# Altium PCB nfc_3911_pcb20190303_1700.PcbDoc
Units mm, origin at the board's own origin, x right, y up, seen from the top; angles counter-clockwise.
Board outline 152.4 x 101.6 mm, 2 copper layers (Top Layer, Bottom Layer); 78 components, 54 nets, 227 pads, 9 vias.
Unrouted connection lines stored in the file: 59.
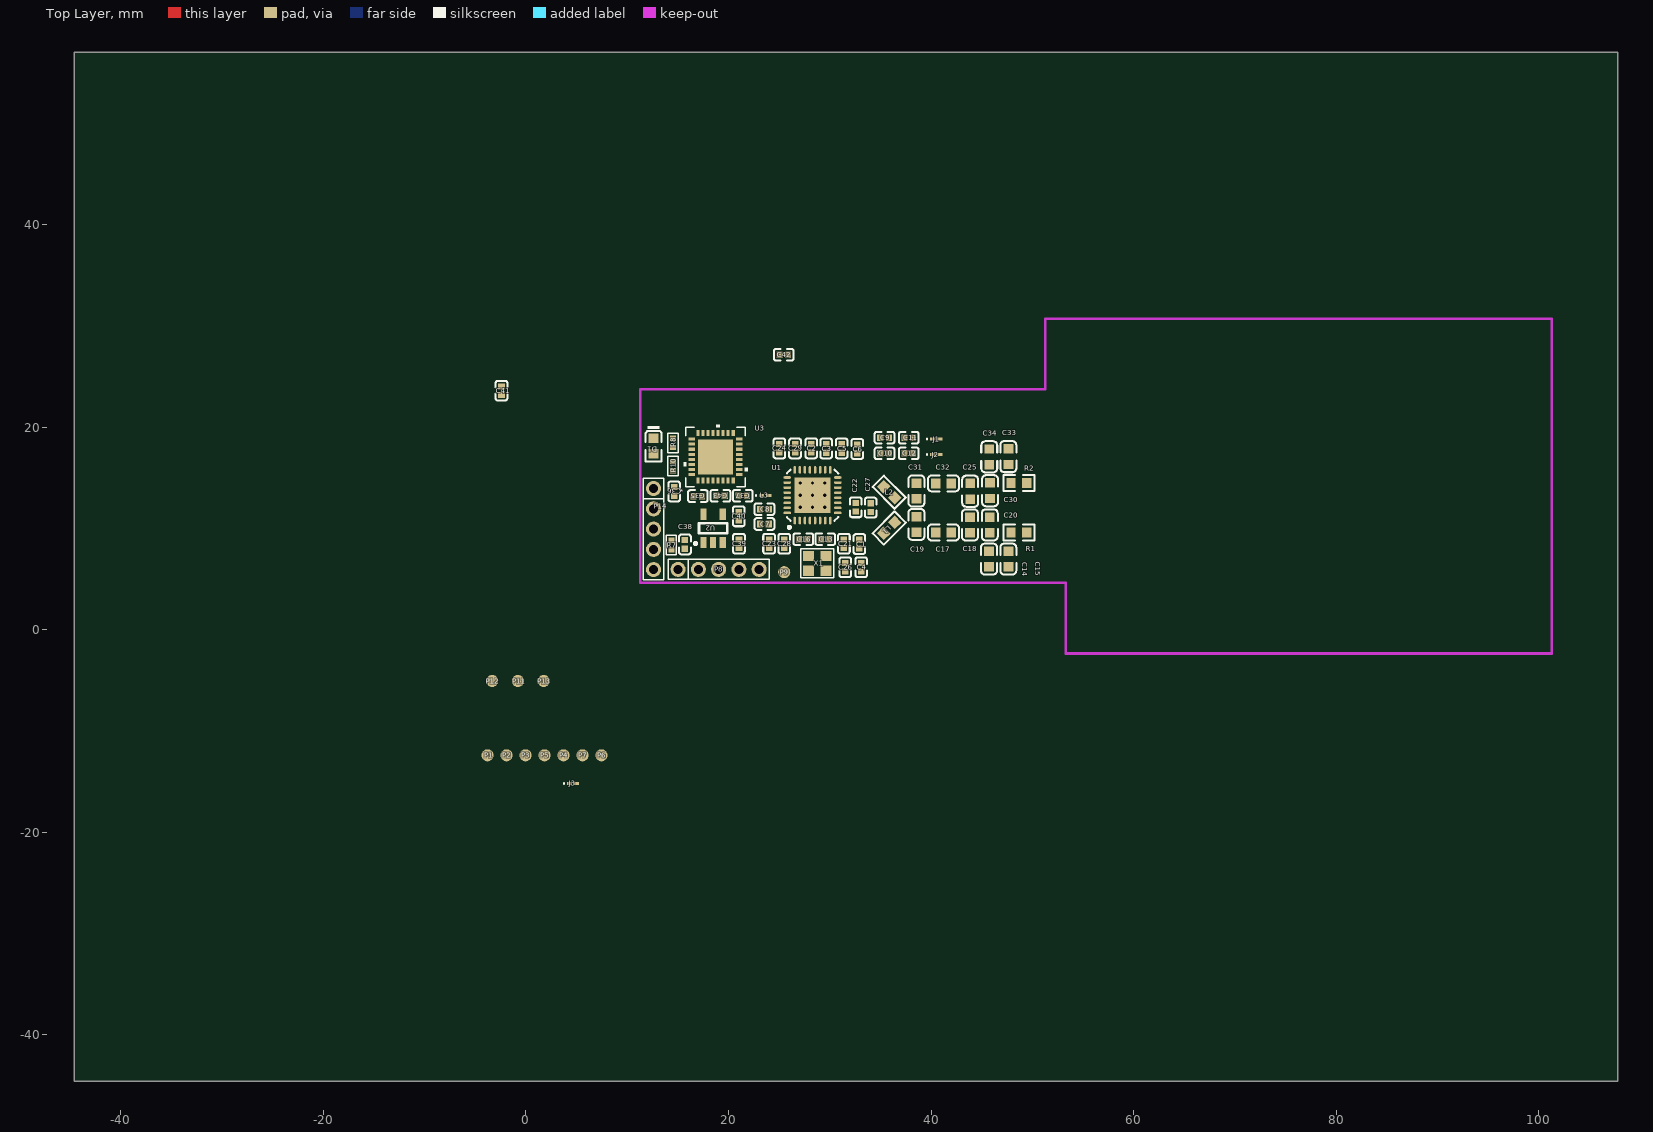
[diagram p0: Top Layer view]
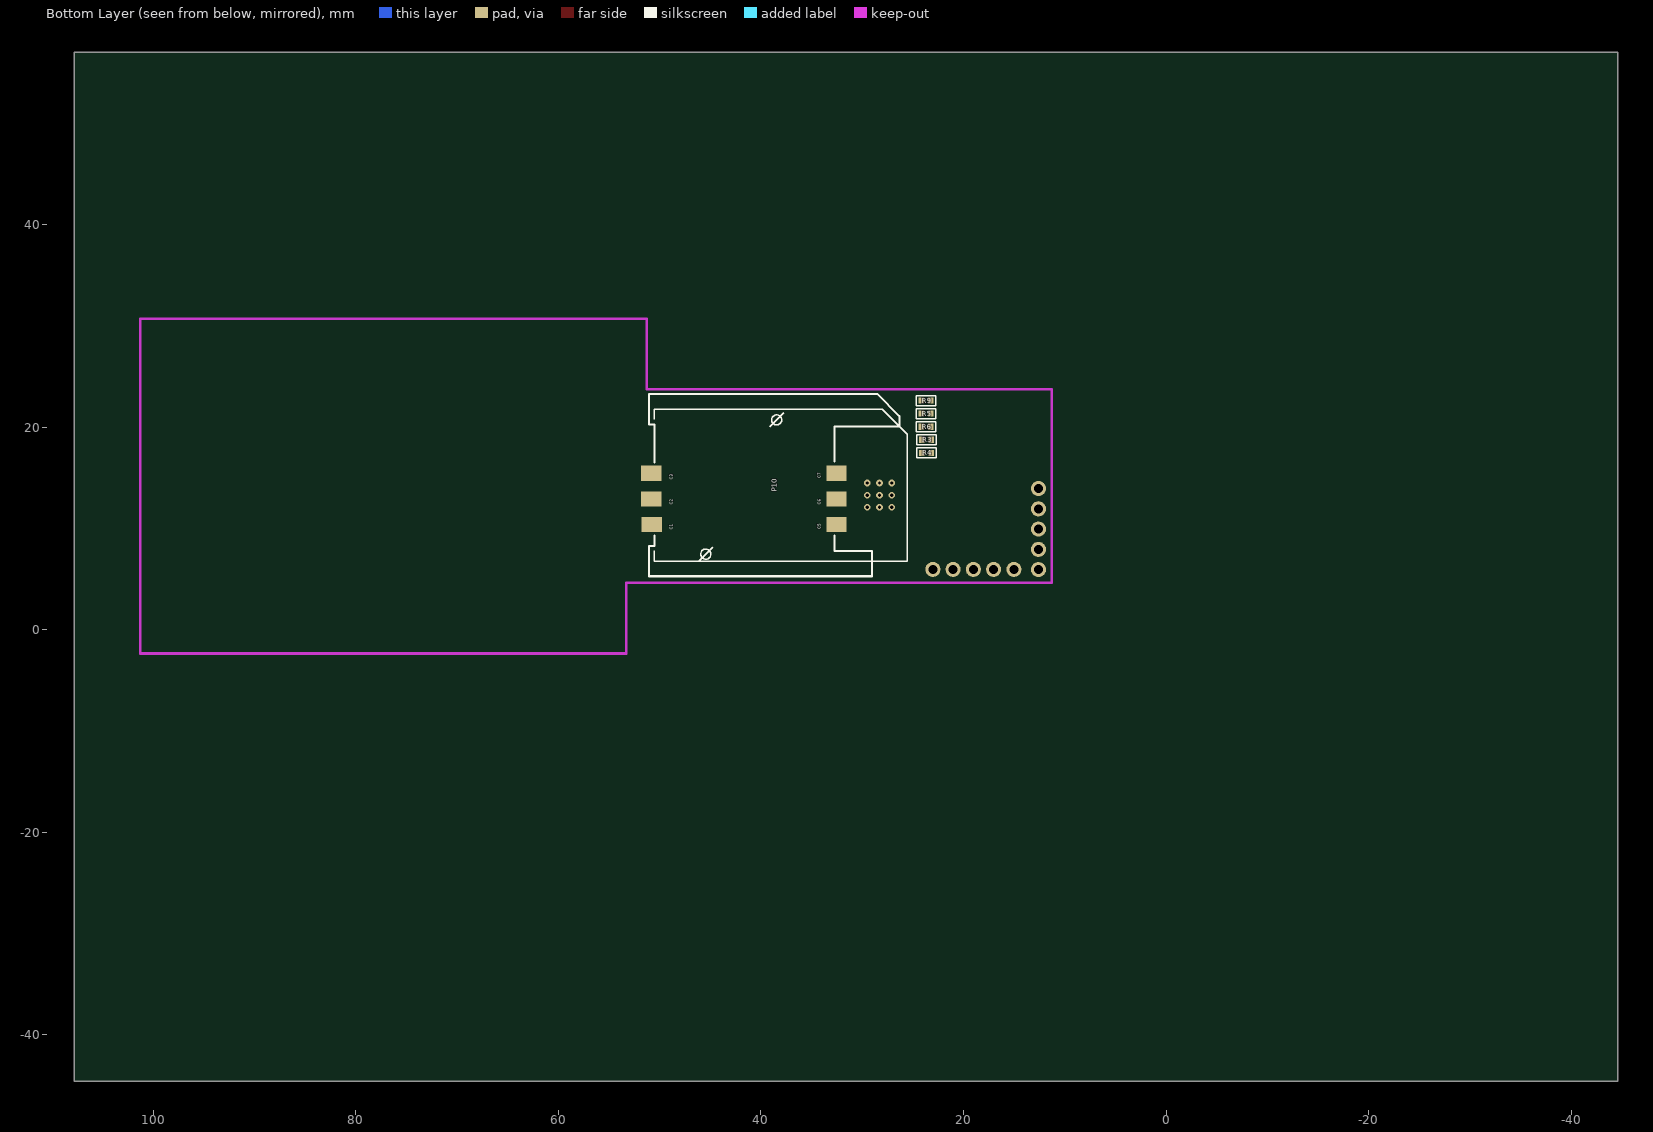
[diagram p1: Bottom Layer view, seen from below]

## Layer stack, top to bottom
Top Solder: solder mask 0.0102, Solder Resist, Dk 3.5
Top Layer: signal copper 0.0356
Dielectric 1: dielectric 0.32, FR-4, Dk 4.8
Bottom Layer: signal copper 0.0356
Bottom Solder: solder mask 0.0102, Solder Resist, Dk 3.5

## Board outline
-44.6,-44.6 107.8,-44.6 107.8,57 -44.6,57

## Design rules (kind name [scope] priority, off if disabled: settings)
Clearance Via_Polygon [isvia vs InPolygon] p1: gap=0.152
Clearance All_Polygon [InPolygon] p2: gap=0.254
Clearance All [All] p3: gap=0.178
PolygonConnect Via_PolygonConnect [ISVIA] p1: connectstyle=Direct reliefconductorwidth=0.254 reliefentries=4 polygonreliefangle="90 Angle" airgapwidth=0.254
PolygonConnect [All] p2: connectstyle=Relief reliefconductorwidth=0.457 reliefentries=4 polygonreliefangle="90 Angle" airgapwidth=0.254
RoutingVias [All] p1: holewidth=0.305 width=0.61 viastyle="Through Hole" minholewidth=0.305 minwidth=0.61 maxholewidth=0.305 maxwidth=0.61
SilkToSilkClearance [All] p1: silktosilkclearance=0.051
SilkToSolderMaskClearance [IsPad] p1: minsilkscreentomaskgap=0.051 clearancetoexposedcopper=TRUE
SolderMaskExpansion [All] p1: expansion=0.064
Width POWER_Width [InNetClass('POWER')] p1: maxlimit=1.524 minlimit=0.203 preferedwidth=0.381
Width [All] p2: maxlimit=0.178 minlimit=0.178 preferedwidth=0.178
28 further rules are at their usual default settings.

## Classes and differential pairs
net class POWER: AVDD GND V_RF_3911 VCC_5V

## Components (designator, comment, footprint, x,y, rotation, side; value= is the part's Value field where it differs from the comment)
C1 "C_1µ_0402_X5R" 0402_C 32.918,8.44 r270 top
C2 "C_5p6_0402" 0402_C 28.169,17.888 r90 top
C3 "C_5p6_0402" 0402_C 29.642,17.882 r90 top
C4 "C_100n_0402_X7R" 0402_C 33.096,6.154 r270 top
C5 "C_12p_0402" 0402_C 31.166,17.882 r90 top
C6 "C_12p_0402" 0402_C 32.715,17.831 r90 top
C7 "d.n.p." 0402_C 23.545,10.421 r0 top
C8 "C_100n_0402_X7R" 0402_C 23.545,11.887 r180 top
C9 "C_27p_0402" 0402_C 35.408,18.948 r0 top
C10 "C_27p_0402" 0402_C 35.408,17.399 r0 top
C11 "C_56p_0402" 0402_C 37.795,18.948 r0 top
C12 "C_56p_0402" 0402_C 37.795,17.399 r0 top
C13 "C_8p2_0402" 0402_C 29.54,8.927 r0 top
C14 "C_82p_0603" 0603_C 45.72,6.96 r90 top
C15 "C_10p_0603" 0603_C 47.625,6.96 r90 top
C16 "C_8p2_0402" 0402_C 27.381,8.927 r0 top
C17 "C_180p_0603" 0603_C 41.224,9.585 r0 top
C18 "d.n.p." 0603_C 43.84,10.33 r90 top
C19 "C_680p_0603" 0603_C 38.557,10.38 r90 top
C20 "C_120p_0603" 0603_C 45.796,10.338 r90 top
C21 "C_10n_0402_X7R" 0402_C 31.394,8.477 r270 top
C22 "C_10n_0402_X7R" 0402_C 32.563,12.065 r90 top
C23 "C_10n_0402_X7R" 0402_C 24.003,8.477 r270 top
C24 "C_10n_0402_X7R" 0402_C 25.019,17.888 r90 top
C25 "d.n.p." 0603_C 43.866,13.657 r90 top
C26 "C_2µ2_0402_X5R" 0402_C 31.521,6.154 r270 top
C27 "C_2µ2_0402_X5R" 0402_C 34.036,12.046 r90 top
C28 "C_2µ2_0402_X5R" 0402_C 25.502,8.477 r270 top
C29 "C_1µ_0402_X5R" 0402_C 26.568,17.888 r90 top
C30 "C_120p_0603" 0603_C 45.822,13.708 r90 top
C31 "C_680p_0603" 0603_C 38.557,13.683 r90 top
C32 "C_180p_0603" 0603_C 41.224,14.428 r0 top
C33 "C_10p_0603" 0603_C 47.625,17.069 r90 top
C34 "C_82p_0603" 0603_C 45.745,17.061 r90 top
C35 "100nF" 0402_C 16.967,13.183 r180 top
C36 "100nF" 0402_C 14.63,13.633 r270 top
C37 "100nF" 0402_C 21.412,13.208 r180 top
C38 "CAP-NP" 0402_C 15.697,8.402 r270 top
C39 "CAP-NP" 0402_C 21.031,8.477 r90 top
C40 "CAP-NP" 0402_C 21.012,11.176 r90 top
C41 "CAP-NP" 0402_C -2.42,23.586 r90 top
C42 "CAP-NP" 0402_C 25.451,27.127 r180 top
C43 "100nF" 0402_C 19.202,13.208 r180 top
D1 "红灯 0603" 0603_LED_S1 12.598,18.11 r270 top
J1 "closed 0R" 0603 40.513,18.821 r0 top net-tie
J2 "closed 0R" 0603 40.513,17.272 r0 top net-tie
J3 "open" 0603 4.657,-15.187 r0 top net-tie
L1 "270n" 0603_L 35.865,10.033 r225 top
L2 "270n" 0603_L 35.865,13.564 r135 top
L3 "BEAD" 0603 23.622,13.259 r0 top
P1 "Hole" TP1 -3.795,-12.416 r0 top
P2 "Hole" TP1 -1.92,-12.416 r0 top
P3 "Hole" TP1 -0.045,-12.416 r0 top
P4 "Hole" TP1 3.705,-12.416 r0 top
P5 "Hole" TP1 1.83,-12.416 r0 top
P6 "Hole" TP1 7.455,-12.416 r0 top
P7 "Hole" TP1 5.58,-12.416 r0 top
P8 "SPI 5-M" "SIP 2.0_5_S" 15.025,5.944 r90 top
P9 "Hole" TP1 25.502,5.664 r0 top
P10 "SIM-4" SIM-MUP-C717 41.681,12.903 r180 bottom
P11 "Hole" TP1 -0.794,-5.077 r0 top
P12 "Hole" TP1 -3.334,-5.077 r90 top
P13 "Hole" TP1 1.746,-5.077 r90 top
P14 "SPI 5-M" "SIP 2.0_5_S" 12.598,13.919 r0 top
R1 "3R9" 0603_R 48.666,9.593 r180 top
R2 "3R9" 0603_R 48.666,14.453 r180 top
R3 "RES" 0402R_0.4D 23.647,18.739 r180 bottom
R4 "RES" 0402R_0.4D 23.647,17.45 r180 bottom
R5 "RES" 0402R_0.4D 23.698,21.317 r0 bottom
R6 "RES" 0402R_0.4D 23.698,20.028 r0 bottom
R7 "RES" 0402R_0.4D 14.351,8.351 r90 top
R8 "RES" 0402R_0.4D 14.518,18.44 r270 top
R9 "RES" 0402R_0.4D 23.698,22.606 r180 bottom
R10 "RES" 0402R_0.4D 14.518,16.129 r90 top
U1 "ST25R3911B" ST25R3911B 26.01,10.084 r0 top
U2 "SGM2028-3.3V" SGM2028-3.3 17.729,11.074 r210 top
U3 "STM32F031K6U6" STM32F031K6U6 18.718,17.056 r90 top
X1 "CRYSTAL-4P" 2520 26.511,5.677 r180 top

## Footprints (in the part's own frame and the unit in brackets; to place one, negate y for a bottom-side part, rotate by r counter-clockwise, add the part's x,y. Pads: shape width x height; smd on the part's side, far side on the other; paste and mask are expansions set on the pad)
0402_C [mm]
  rect 0.6x0.65 smd mask+0.051: 1(-0.425,0) 2(0.425,0)
  silkscreen extent -0.97,-0.58 0.97,0.58, body extent -0.48,-0.3 0.52,0.3, height 0.2
0402R_0.4D [mm]
  rect 0.525x0.6 smd: 1(-0.463,0) 2(0.463,0)
  silkscreen extent -0.96,-0.5 0.96,0.5, body extent -0.5,-0.25 0.5,0.25, height 0.38
0603 [mm] "Chip Inductor, Body 0.6x0.3mm, IPC High Density"
  rect 0.5x0.3 smd: 1(-0.35,0) 2(0.35,0)
  silkscreen extent -0.9,-0.05 -0.9,0.05, body extent -0.33,-0.18 0.33,0.18, height 0.55
0603_C [mm]
  rect 0.93x0.98 smd: 1(-0.77,0) 2(0.77,0)
  silkscreen extent -1.53,-0.79 1.54,0.79, body extent -0.8,-0.4 0.8,0.4, height 0.3
0603_L [mm]
  rect 0.93x0.98 smd: 1(-0.77,0) 2(0.77,0)
  silkscreen extent -1.53,-0.79 1.54,0.79, body extent -0.82,-0.41 0.83,0.41, height 0.46
0603_LED_S1 [mm]
  rect 0.93x0.98 smd: A(0.77,0) K(-0.77,0)
  silkscreen extent -1.97,-0.79 1.54,0.79, body extent -0.8,-0.4 0.8,0.4, height 0.6
0603_R [mm]
  rect 0.93x0.98 smd: 1(-0.77,0) 2(0.77,0)
  silkscreen extent -1.53,-0.79 1.54,0.79, body extent -0.85,-0.4 0.85,0.4, height 0.56
2520 [mm]
  rect 1.1x1 smd: 1(-3.13,-1.585) 2(-1.38,-1.585) 3(-1.38,-0.135) 4(-3.13,-0.135)
  round 0.2 on Mech1: 3(-2.255,-0.86)
  rect 0.8x0.65 on Mech1: 4(-1.505,-1.435) 5(-3.005,-1.435) 6(-1.505,-0.285) 7(-3.005,-0.285)
  silkscreen extent -3.9,-2.32 -0.62,0.58
SGM2028-3.3 [mm]
  rect 0.6x1.1 smd rot 150: 1(1.412,2.051) 2(0.589,2.526) 3(-0.234,3.001) 4(-1.634,0.577) 5(0.012,-0.373)
  silkscreen extent -1.57,0.18 2.28,2.45
SIM-MUP-C717 [mm] "翻盖SIM卡座 参考MUP-C717"
  rect 2x1.5 smd: 1(-9.1,-2.54) 2(-9.15,0) 3(-9.15,2.54) 5(9.15,-2.54) 6(9.15,0) 7(9.15,2.54)
  silkscreen extent -9.35,-7.64 16.15,10.36, body extent -9.35,-7.64 15.35,10.36, height 1.9
"SIP 2.0_5_S" [mm]
  round 1.5 hole 0.9: 1(0,0) 2(0,-2) 3(0,-4) 4(0,-6) 5(0,-8)
  silkscreen extent -1,-9 1,1
ST25R3911B [mm]
  oval 0.25x0.75 smd: 1(0.534,0.682) 2(1.034,0.682) 3(1.534,0.682) 4(2.034,0.682) 5(2.534,0.682) 6(3.034,0.682) 7(3.534,0.682) 8(4.034,0.682) 17(4.034,5.682) 18(3.534,5.682) 19(3.034,5.682) 20(2.534,5.682) 21(2.034,5.682) 22(1.534,5.682) 23(1.034,5.682) 24(0.534,5.682)
  oval 0.75x0.25 smd: 9(4.784,1.432) 10(4.784,1.932) 11(4.784,2.432) 12(4.784,2.932) 13(4.784,3.432) 14(4.784,3.932) 15(4.784,4.432) 16(4.784,4.932) 25(-0.216,4.932) 26(-0.216,4.432) 27(-0.216,3.932) 28(-0.216,3.432) 29(-0.216,2.932) 30(-0.216,2.432) 31(-0.216,1.932) 32(-0.216,1.432)
  rect 3.6x3.5 smd paste-10: 33(2.284,3.182)
  silkscreen extent -0.26,-0.12 4.82,5.72, body extent -0.22,0.68 4.78,5.68, height 0.85
STM32F031K6U6 [mil]
  rect 24x12 smd paste-6: 1(-92.52,68.91) 2(-92.52,49.22) 3(-92.52,29.53) 4(-92.52,9.84) 5(-92.52,-9.85) 6(-92.52,-29.54) 7(-92.52,-49.23) 8(-92.52,-68.91) 17(92.52,-68.91) 18(92.52,-49.23) 19(92.52,-29.54) 20(92.52,-9.85) 21(92.52,9.84) 22(92.52,29.53) 23(92.52,49.22) 24(92.52,68.91)
  rect 12x24 smd paste-6: 9(-68.91,-92.52) 10(-49.22,-92.52) 11(-29.53,-92.52) 12(-9.84,-92.52) 13(9.84,-92.52) 14(29.53,-92.52) 15(49.22,-92.52) 16(68.91,-92.52) 25(68.91,92.52) 26(49.22,92.52) 27(29.53,92.52) 28(9.84,92.52) 29(-9.84,92.52) 30(-29.53,92.52) 31(-49.22,92.52) 32(-68.91,92.52)
  rect 136x136 smd paste-68: 33(0,0)
  silkscreen extent -116,-125 125,125, body extent -102,-102 102,102, height 22
TP1 [mil]
  round 47 smd: 0(0,0)

## Part data
C1 C29: library part C_1μ_0402_X5R, "1u_X5R"
C2 C3: "5p6_COG"
C4 C8: "100n_X7R"
C5 C6: "12p_COG"
C7: library part C_0402
C9 C10: "27p_COG"
C11 C12: "56p_COG"
C13 C16: "8p2_COG"
C14 C34: "82p_COG"
C15 C33: "10p_COG"
C17 C32: "180p_COG"
C18 C25: library part C_0603
C19 C31: "680p_COG"
C20 C30: "120p_COG"
C21 C22 C23 C24: "10n_x7R"
C26 C27 C28: library part C_2μ2_0402_X5R, "2u2_X5R"
C35 C36 C37: library part Cap, "Capacitor"
C38 C39: library part 1405000354, "1uF/6.3V/10%/X5R"
C40: library part 1405000727, "10nF/25V/10%/X7R"
C41 C42: library part 1405000357, "0.1uF/16V/10%/X5R"
C43: library part CAP, "Capacitor"
D1: library part "0603 红灯", "发光二极管"
J1 J2: library part solder_jumper_closed, "0R"
J3: library part solder_jumper_open
L1 L2: library part L0603_270nH, "L0603_270nH"
L3: library part Inductor, "Inductor"
P8 P14: library part 1416000091, "2.00mm/1*5P/单排/直/PA=4/PC=2.8"
P10: library part 1416000310, "SIM卡座"
R1 R2: library part R0603_3R9, "3R9, 0603"
R3 R6 R9: library part 1408000466, "33R/5%/100PPM"
R4 R5: library part 1408001061, "10K/1%/100PPM"
R7 R8: library part 1408000535, "1K/5%/100PPM"
R10: library part 1408000127, "10K/1%/100PPM"
U1: library part ST25R3911, "NFC Initiator / HF Reader IC"
U2: library part SGM2028
U3: library part MCU_LQFP32
X1: library part 1413000276, "10pF/40MHz/10PPM/60Ωmax/-40°~85°"

## Via types
v1: diameter 0.66, hole 0.33, Top Layer to Bottom Layer, tented both sides, 9 vias

## Nets (pads, with @x,y where several pads share a name; then routed paths per layer and width w, separated by ;. In a path a pad name is that pad's centre, name@x,y a point inside that pad or via, vN(x,y) a via of type N, cw(c..) or ccw(c..) an arc to the next point about the centre after c; other vN are vias at no path point)
AGD: C24.1 C29.1 U1.24
"ANTENNA LOOP": R1.1 R2.1
AVDD: C37.1 L3.1 U3.5
BOOT0: R10.2 U3.31
CLK1: R6.1 U3.21
CLK2: P14.4 U3.30
DATA1: R9.1 U3.20
DATA2: P14.5 U3.29
GND: C1.2 C4.2 C7.1 C8.2 C13.2 C14.1 C16.1 C18.2 C19.2 C20.2 C21.2 C22.2 C23.2 C24.2 C25.1 C26.2 C27.2 C28.2 C29.2 C30.1 C31.1 C34.2 C35.2 C36.2 C37.2 C38.1 C39.1 C40.1 C41.1 C42.2 C43.1 P8.2 P10.5 P14.2 R10.1 U1.6 U1.12 U1.21 U1.26 U1.33 U2.2 X1.2 X1.4@29.641,5.812
  other v1: 27.094,12.066 28.294,12.066 29.494,12.066 27.094,13.266 28.294,13.266 29.494,13.266 27.094,14.466 28.294,14.466 29.494,14.466
INTR_11: U1.27 U3.15
MISO_11: U1.29 U3.12
MOSI_11: U1.30 U3.13
NetC2_2: C2.2 C5.2 C9.2 C11.2 J1.1
NetC3_2: C3.2 C6.2 C10.2 C12.2 J2.1
NetC13_1: C13.1 U1.5 X1.1
NetC16_2: C16.2 U1.4 X1.3@27.891,5.812
NetC17_1: C17.1 C19.1 L1.1
NetC31_2: C31.2 C32.1 L2.1
NetC39_2: C39.2 U2.4
NetC41_2: C41.2 P10.2 R3.1 R4.1
NetC42_1: C42.1 P10.1
NetD1_K: D1.K R8.1
NetP10_3: P10.3 R6.2
NetP10_7: P10.7 R5.1 R9.2
NetR7_2: R7.2 U2.3
NRST: C43.2 U3.4
RFI1: C14.2 C15.1 U1.22
RFI2: C33.2 C34.1 U1.23
RFO1: L1.2 U1.10
RFO2: L2.2 U1.11
RST1: R3.2 U3.22
RST2: P14.3 U3.32
RXD: P8.4 U3.9
SCLK_11: U1.31 U3.11
SEN_11: U1.32 U3.10
STATE: P8.5 R8.2 U3.28
SWDCLK: U3.24
SWDIO: U3.23
TRIM1: C15.2 C17.2 C18.1 C20.1 J2.2 R1.2
TRIM1_0: C3.1 U1.19
TRIM1_1: C6.1 U1.17
TRIM1_2: C10.1 U1.15
TRIM1_3: C12.1 U1.13
TRIM2: C25.2 C30.2 C32.2 C33.1 J1.2 R2.2
TRIM2_0: C2.1 U1.20
TRIM2_1: C5.1 U1.18
TRIM2_2: C9.1 U1.16
TRIM2_3: C11.1 U1.14
TXD: P8.3 U3.8
V_RF_3911: C1.1 C4.1 C7.2 C8.1 C35.1 C36.1 C40.2 D1.A J3.1 L3.2 P14.1 R4.2 R5.2 U1.1 U1.8 U2.5 U3.1 U3.17
VCC_5V: C38.2 P8.1 R7.1 U2.1
VSP_A: C21.1 C26.1 U1.7
VSP_D: C23.1 C28.1 U1.3
VSP_RF: C22.1 C27.1 J3.2 U1.9
pads on no net: P1.0 P2.0 P3.0 P4.0 P5.0 P6.0 P7.0 P9.0 P10.6 P11.0 P12.0 P13.0 U1.2 U1.25 U1.28 U3.2 U3.3 U3.6 U3.7 U3.14 U3.16 U3.18 U3.19 U3.25 U3.26 U3.27 U3.33 X1.3@28.766,6.537 X1.4@28.016,7.112 X1.5 X1.6 X1.7

## Keep-outs
Keep-Out Layer:
  lines w0.254: 11.295,4.635 11.295,23.709 51.295,23.709 51.295,30.709 101.295,30.709 101.295,-2.365 53.289,-2.365 53.289,4.635 11.295,4.635

## Text inside footprints (layer, text, board x,y; h text height)
P10: Mechanical 1 "LOCK" at 44.681,7.643 h0.51; Mechanical 1 "OPEN" at 38.061,21.083 h0.51 r180; Bottom Overlay "C1" at 48.621,9.853 h0.51 r270; Bottom Overlay "C5" at 33.991,9.883 h0.51 r270; Bottom Overlay "C2" at 48.619,12.318 h0.51 r270; Bottom Overlay "C6" at 33.991,12.303 h0.51 r270; Bottom Overlay "C3" at 48.619,14.783 h0.51 r270; Bottom Overlay "C7" at 33.991,14.933 h0.51 r270
U3: Top Overlay "*" at 15.71,13.573 h0.51 r90; Mechanical 13 "*" at 16.717,15.264 h0.51 r90